# Altium PCB Pr7.PcbDoc
Units mil, origin at the board's own origin, x right, y up, seen from the top; angles counter-clockwise.
Board outline 15070 x 10580 mil, 2 copper layers (Top Layer, Top, Bottom Layer, Bottom); 17 components, 14 nets, 51 pads, 10 vias.
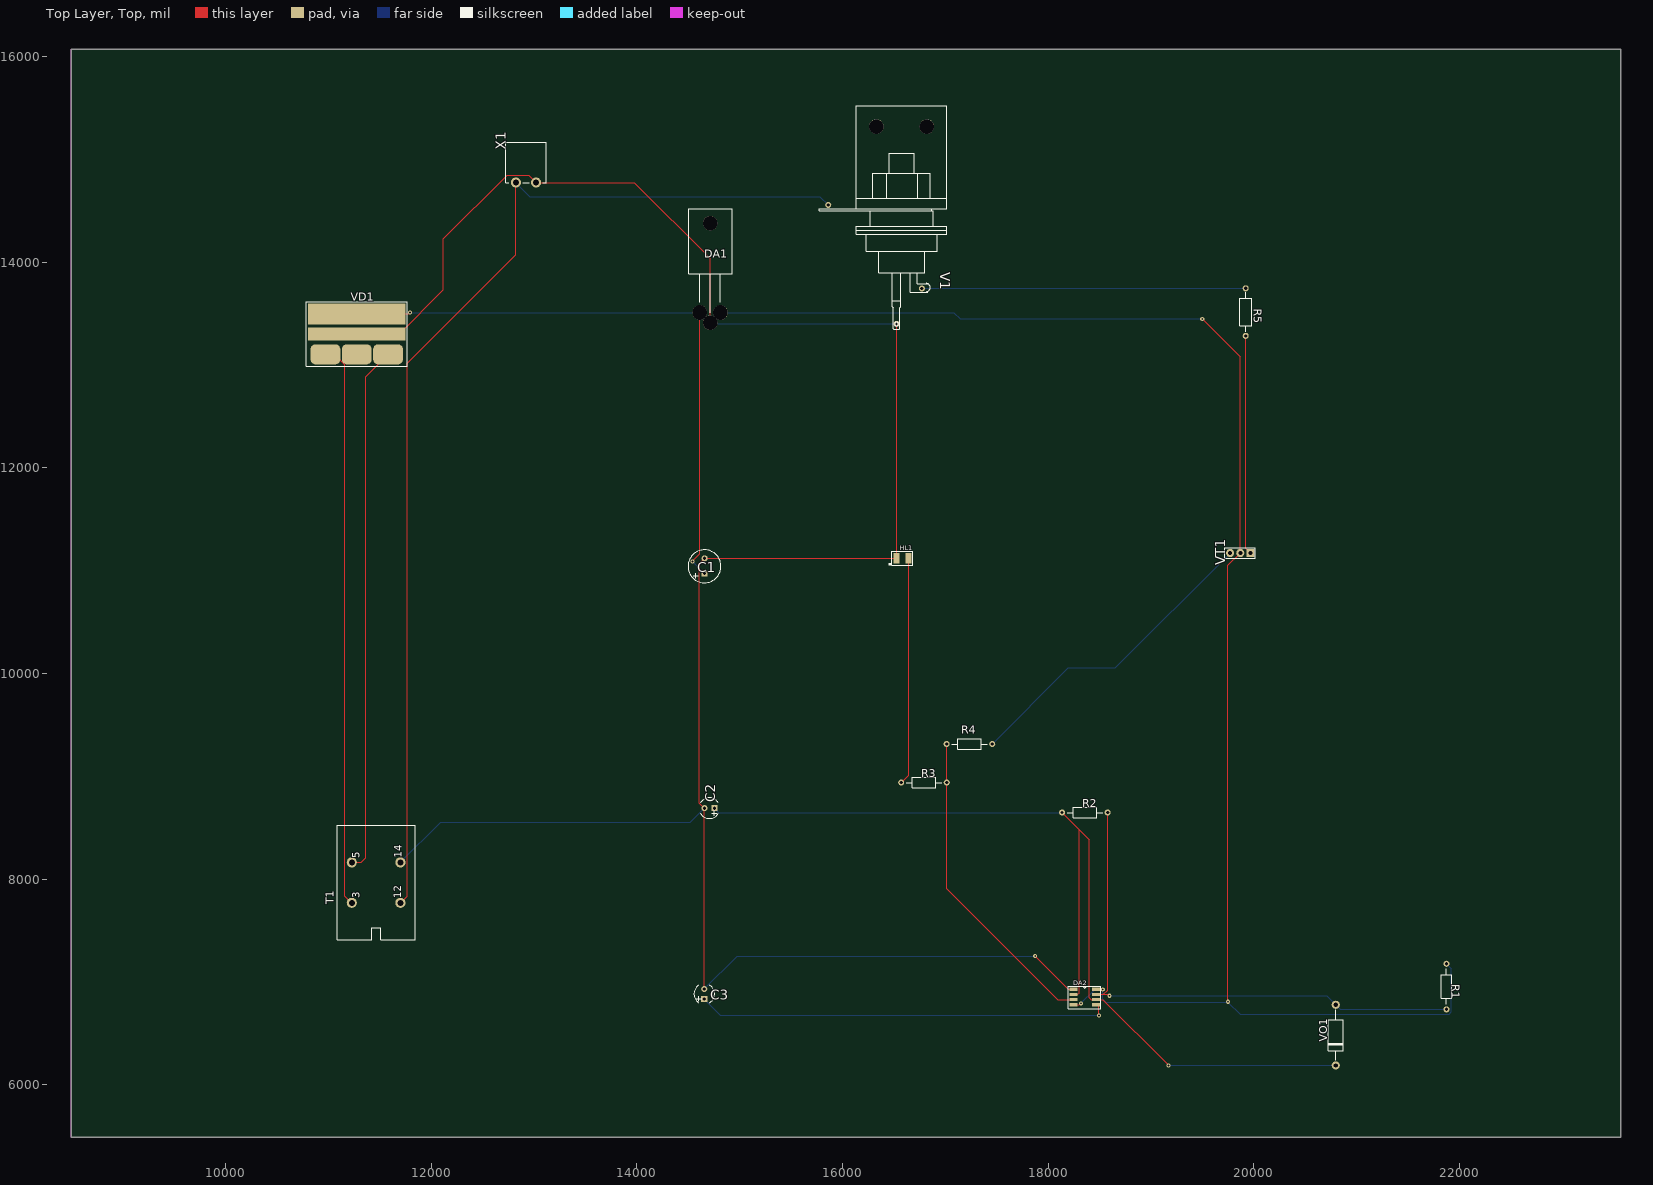
[diagram p0: Top Layer, Top view]
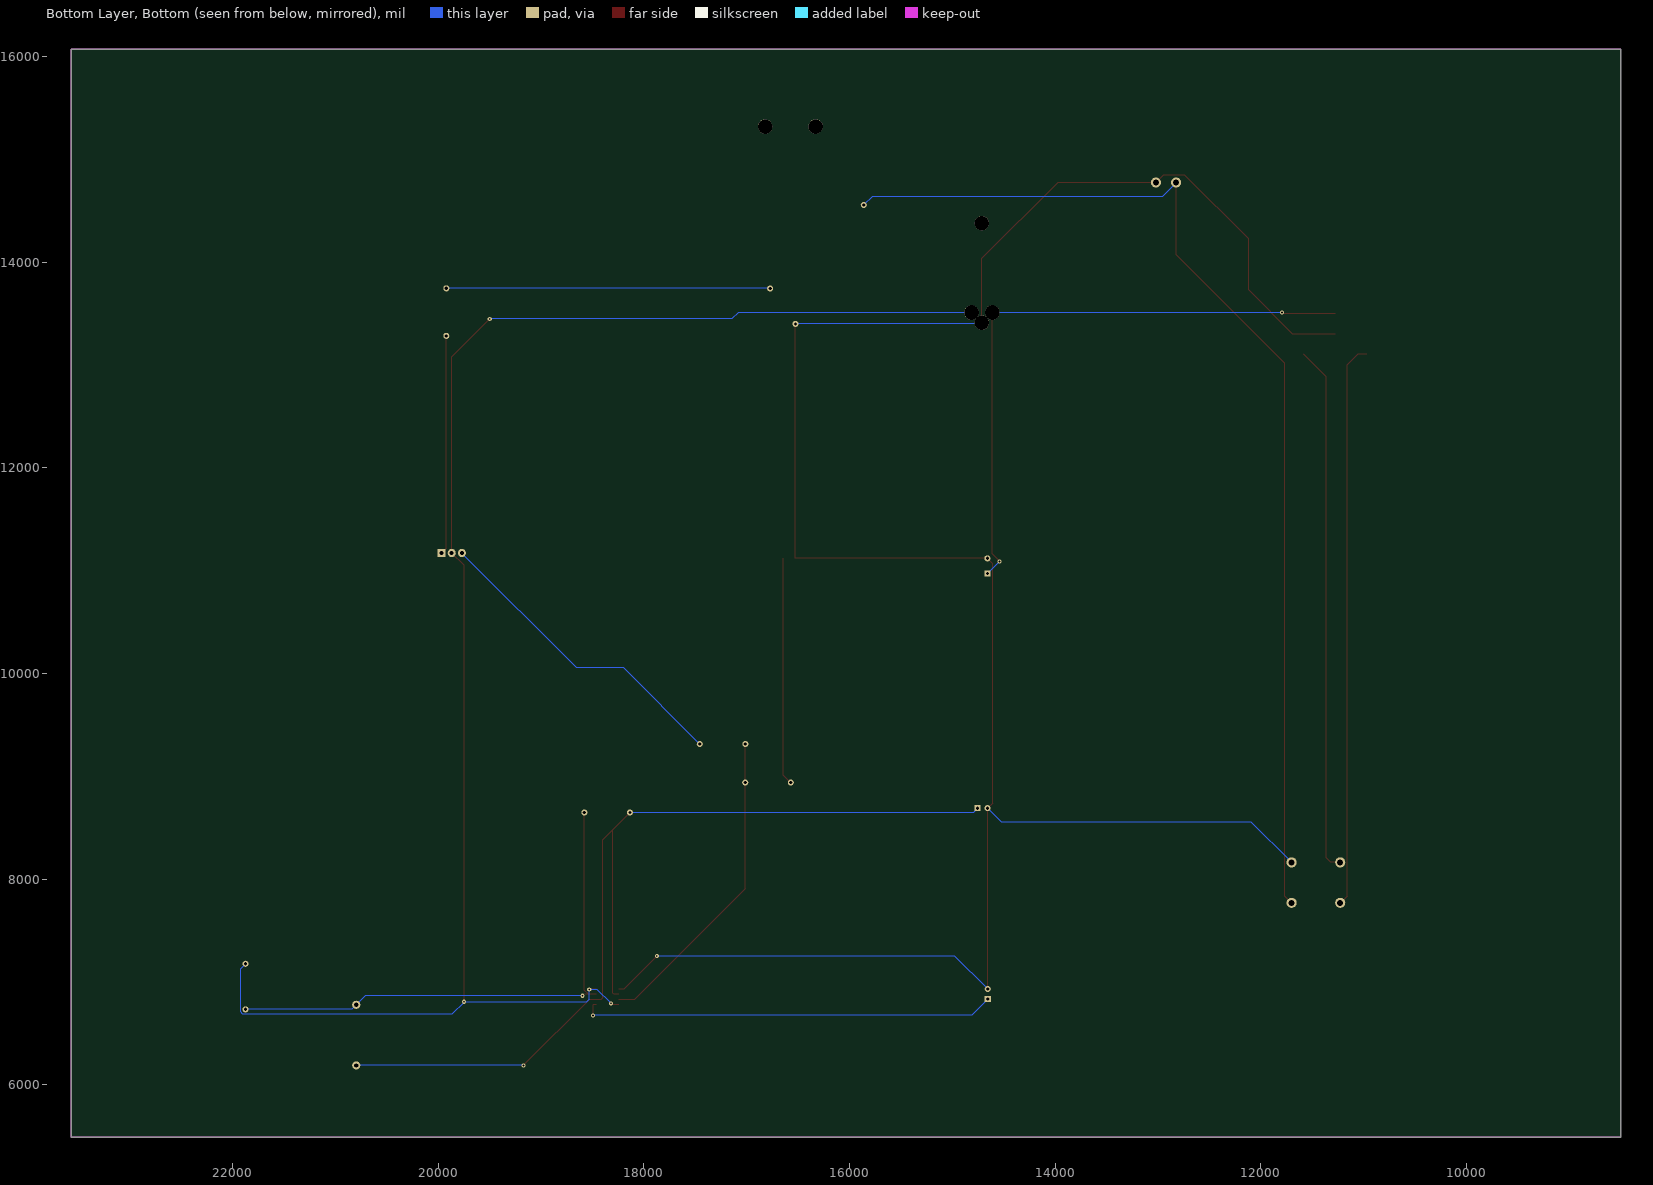
[diagram p1: Bottom Layer, Bottom view, seen from below]

## Layer stack, top to bottom
Top Solder, Top Mask: solder mask 0.4, Solder Resist, Dk 3.5
Top Layer, Top: signal copper 1.4
Dielectric 1: dielectric 12.6, FR-4, Dk 4.8
Bottom Layer, Bottom: signal copper 1.4
Bottom Solder, Bot Mask: solder mask 0.4, Solder Resist, Dk 3.5

## Board outline
8500,16070 8500,5490 23570,5490 23570,16070

## Design rules (kind name [scope] priority, off if disabled: settings)
Clearance [All] p1: gap=10 ignorepadtopadclearanceinfootprint=FALSE except(0: Arc-Hole Track-Hole SMDPad-Hole THPad-Hole Via-Hole Fill-Hole Poly-Hole Region-Hole Text-Hole; 12: Arc-Arc Arc-Track Arc-THPad Arc-Via Track-Track Track-THPad Track-Via THPad-THPad THPad-Via Via-Via)
PlaneClearance [All] p1: clearance=10
PolygonConnect [All] p1: connectstyle=Relief reliefconductorwidth=10 reliefentries=4 polygonreliefangle="90 Angle" airgapwidth=10
RoutingVias [All] p1: holewidth=28 width=50 viastyle="Through Hole" minholewidth=28 minwidth=50 maxholewidth=28 maxwidth=50
SolderMaskExpansion [All] p1: expansion=4
Width [All] p1: maxlimit=10 minlimit=10 preferedwidth=10
29 further rules are at their usual default settings.

## Components (designator, comment, footprint, x,y, rotation, side; value= is the part's Value field where it differs from the comment)
C1 "470mk" R50-35-08XX_Primary 14659.7,10971 r0 top
C2 "1mk" К50-35-0511_Primary 14756.6,8689.2 r90 top
C3 "0,1mk" К50-35-0511_Primary 14656.3,6832 r0 top
DA1 "" TO-220-KT-28-2_КР142ЕН5А(Primary) 14613.6,13510 r0 top
DA2 "" SO-8 18246.1,6927.1 r0 top
HL1 "{Value}" 3528 16526.6,11119.2 r0 top
R1 "470k" C2-33H-0.125W 21875.1,7175.5 r270 top
R2 "470k" C2-33H-0.125W 18136.9,8646.6 r0 top
R3 "220" C2-33H-0.125W 16572,8938.2 r0 top
R4 "130" C2-33H-0.125W 17457.2,9313 r180 top
R5 "56" C2-33H-0.25W 19922.7,13745.1 r270 top
T1 "" TRANS_1_TRANS_1(Primary) 11464.5,7965.1 r90 top
V1 "" TC122_TC122(Primary) 16526.6,13399.2 r270 top
VD1 "" 2Д2136АС 10971.4,13103.2 r0 top
VO1 "" DO-7_1N34(Primary) 20798.4,6481.5 r90 top
VT1 "" KT13_КТ315Б(Primary) 19968.3,11170.8 r90 top
X1 "~220 V" 2XR 13020.8,14774.2 r90 top

## Footprints (in the part's own frame and the unit in brackets; to place one, negate y for a bottom-side part, rotate by r counter-clockwise, add the part's x,y. Pads: shape width x height; smd on the part's side, far side on the other; paste and mask are expansions set on the pad)
2XR [mm]
  round 2.5 hole 1.5: 1(0,0) 2(0,5)
  silkscreen extent 0,-2.5 10,7.5
2Д2136АС [mm]
  rrect50% 7.4x4.96 smd: 1(0,0) 2(7.75,0) 3(15.5,0)
  rect 24.1x3.2 smd: 4(7.75,5)
  rect 24.1x5.14 smd: 5(7.75,10)
  silkscreen extent -4.75,-3 20.25,13
3528 [mm]
  rect 1.5x2.6 smd: 1(0,0) 2(3,0)
  silkscreen extent -1.96,-1.71 4.04,1.79
C2-33H-0.25W [mm]
  round 1.5 hole 0.8: 1(0,0) 2(11.75,0)
  silkscreen extent 1,-1.5 10.75,1.5
C2-33H-0.125W [mm]
  round 1.5 hole 0.8: 1(0,0) 2(11.25,0)
  silkscreen extent 1.25,-1.25 10,1.25
DO-7_1N34(Primary) [mm]
  round 2 hole 1: A(7.5,0) K(-7.5,0)
  silkscreen extent -6.25,-1.8 6.25,1.8
KT13_КТ315Б(Primary) [mm]
  rect 2x2 hole 1: 1(0,0)
  round 2 hole 1: 2(0,5) 3(0,2.5)
  silkscreen extent -1.25,-1.17 1.25,6.33
R50-35-08XX_Primary [mm]
  rect 1.5x1.5 hole 0.8: 1(0,0)
  round 1.5 hole 0.8: 2(0,3.75)
  silkscreen extent -4.08,-2.27 4.04,5.85
SO-8 [mm]
  rect 2x0.8 smd: 1(0,0) 2(0,-1.27) 3(0,-2.54) 4(0,-3.81) 5(5.588,-3.81) 6(5.588,-2.54) 7(5.588,-1.27) 8(5.588,0)
  silkscreen extent -1.21,-4.75 6.79,0.75
TC122_TC122(Primary) [mm]
  round 1.5 hole 0.8: 1(0,0) 2(-29.375,-16.875) UE(-8.75,6.25)
  round 3.6 hole 3.6 unplated: 4(-48.75,7.5) 5(-48.75,-5)
  silkscreen extent -53.85,-19.05 1.27,12.45
TO-220-KT-28-2_КР142ЕН5А(Primary) [mm]
  round 3.6 hole 3.6 unplated: 2(5.08,0) 4(2.55,22.07) 8(2.54,-2.54) 17(0,0)
  silkscreen extent -2.8,0 7.95,25.57
TRANS_1_TRANS_1(Primary) [mm]
  round 2.5 hole 1.5: 3(-5,6) 5(5,6) 12(-5,-6) 14(5,-6)
  silkscreen extent -14.13,-9.63 14.13,9.63
К50-35-0511_Primary [mm]
  rect 1.5x1.5 hole 0.8: 1(0,0)
  round 1.5 hole 0.8: 2(0,2.5)
  silkscreen extent -2.55,-0.9 2.54,3.47

## Via types
v1: diameter 40, hole 18, Top Layer, Top to Bottom Layer, Bottom, 10 vias

## Nets (pads, with @x,y where several pads share a name; then routed paths per layer and width w, separated by ;. In a path a pad name is that pad's centre, name@x,y a point inside that pad or via, vN(x,y) a via of type N, cw(c..) or ccw(c..) an arc to the next point about the centre after c; other vN are vias at no path point)
NET00000: T1.3 VD1.1 | length 5492.6
  Top Layer, Top w10: VD1.1 11058.8,13103.2 11162,13000 11162,7834.53 T1.3
NET00001: T1.5 VD1.3 | length 5141.7
  Top Layer, Top w10: T1.5 11320,8161.95 11364,8205.95 11364,12886.2 11581,13103.2 VD1.3
NET00002: T1.12 V1.2 X1.2 | length 10600
  Top Layer, Top w10: T1.12 11767,7834.53 11767,13014 12823.95,14070.95 X1.2
  Bottom Layer, Bottom w10: X1.2 12961.15,14637 15780.93,14637 V1.2
NET00004: C1.1 DA1.17 VD1.5 | length 5961.2
  Top Layer, Top w10: VD1.5 11782,13496.9 v1(11795.1,13510) ; v1(14540.85,11089.85) 14613,11162 14613,13510 DA1.17
  Bottom Layer, Bottom w10: v1(11795.1,13510) DA1.17 ; v1(14540.85,11089.85) C1.1
NET00007: DA2.7 R1.2 R2.2 VO1.A | length 5256.1
  Top Layer, Top w10: DA2.7 18536.91,6877.1 ; R2.2 18579.81,6920 18536.91,6877.1 ; v1(18597,6864) 18583.9,6877.1 18536.91,6877.1
  Bottom Layer, Bottom w10: v1(18597,6864) 20711.18,6864 VO1.A 20842.59,6732.59 R1.2
NET00008: C2.1 DA2.2 DA2.6 R2.1 VO1.K | length 9631.3
  Top Layer, Top w10: R2.1 18303,8480.5 ; DA2.2 18290.1,6877.1 18303,6890 18303,8480.5 ; v1(19172.88,6186.22) 18532,6827.1 DA2.6 18420,6827.1 18400,6847.1 18400,8383.5 18303,8480.5
  Bottom Layer, Bottom w10: C2.1 14799.2,8646.6 R2.1 ; v1(19172.88,6186.22) VO1.K
NET00009: C3.1 DA2.5 | length 4036.1
  Top Layer, Top w10: DA2.5 18495,6777.1 v1(18495,6674)
  Bottom Layer, Bottom w10: C3.1 14814.3,6674 v1(18495,6674)
NET00010: DA2.3 R3.2 R4.2 | length 3084.6
  Top Layer, Top w10: R4.2 17014.29,9125.63 17014.91,9125 R3.2 17014.91,7907.19 18095,6827.1 DA2.3
NET00011: HL1.2 R3.1 | length 2211.1
  Top Layer, Top w10: R3.1 16644.71,9010.91 HL1.2
NET00013: R5.1 V1.UE | length 3150.6
  Bottom Layer, Bottom w10: V1.UE 18346,13743.69 18347.41,13745.1 R5.1
NET00014: R5.2 VT1.1 | length 2130.6
  Top Layer, Top w10: R5.2 19922.7,11216.4 VT1.1
NET00015: R4.1 VT1.2 | length 3083.8
  Bottom Layer, Bottom w10: R4.1 18197.2,10053 18653.65,10053 VT1.2
NET00016: DA1.2 DA2.4 DA2.8 R1.1 VT1.3 | length 16014.4
  Top Layer, Top w10: DA2.4 18305.1,6777.1 v1(18319,6791) ; DA2.8 18529.9,6927.1 v1(18532,6925) ; v1(19500,13448) 19869.87,13078.13 VT1.3 19750,11050.93 v1(19750,6806)
  Bottom Layer, Bottom w10: DA1.2 17082,13510 17144,13448 v1(19500,13448) ; v1(18319,6791) 18453,6925 v1(18532,6925) 18532,6830 18560,6802 v1@19750,6802 ; v1(19750,6806) v1@19750,6802 ; R1.1 21922,7128.6 21922,6708 21900,6686 19870,6686 v1@19750,6802
NET00017: C1.2 C2.2 C3.2 DA1.8 DA2.1 HL1.1 T1.14 V1.1 VD1.4 X1.1 | length 22555.3
  Top Layer, Top w10: VD1.4 11688,13300.05 12120,13732.05 12120,14226 12740,14846 12949,14846 X1.1 13975.8,14774.2 14713.6,14036.4 DA1.8 ; C3.2 14656.3,7808 14658.17,7809.87 C2.2 14609,8738.37 14609,11067.94 C1.2 15592,11118.64 15592.56,11119.2 HL1.1 V1.1 ; v1(17875,7250) 18197.9,6927.1 DA2.1
  Bottom Layer, Bottom w10: T1.14 12091.77,8553 14521.97,8553 C2.2 ; C3.2 14975.87,7250 v1(17875,7250) ; DA1.8 14724.4,13399.2 V1.1
pads on no net: DA1.4 V1.4 V1.5 VD1.2

## Keep-outs
Keep-Out Layer, Board:
  the board outline again, w5

## Text inside footprints (layer, text, board x,y; h text height)
T1: Top Overlay, Top Silk "3" at 11305.84,7814.31 h69.44 r90; Top Overlay, Top Silk "5" at 11307.02,8203.68 h69.44 r90; Top Overlay, Top Silk "12" at 11710.17,7814.31 h69.44 r90; Top Overlay, Top Silk "14" at 11712.53,8208.41 h69.44 r90
VT1: Mechanical 1, Top Assy "Э" at 19994.68,11082.22 h78.12 r90; Mechanical 1, Top Assy "К" at 19886.41,11082.22 h78.12 r90; Mechanical 1, Top Assy "Б" at 19787.99,11082.22 h78.12 r90